# Altium PCB PCB1.PcbDoc (part 9 of 10)
Units mm, origin at the board's own origin, x right, y up, seen from the top; angles counter-clockwise.
Board outline 171.83 x 244.04 mm, 2 copper layers (Top Layer, Bottom Layer); 100 components, 186 nets, 878 pads, 221 vias.
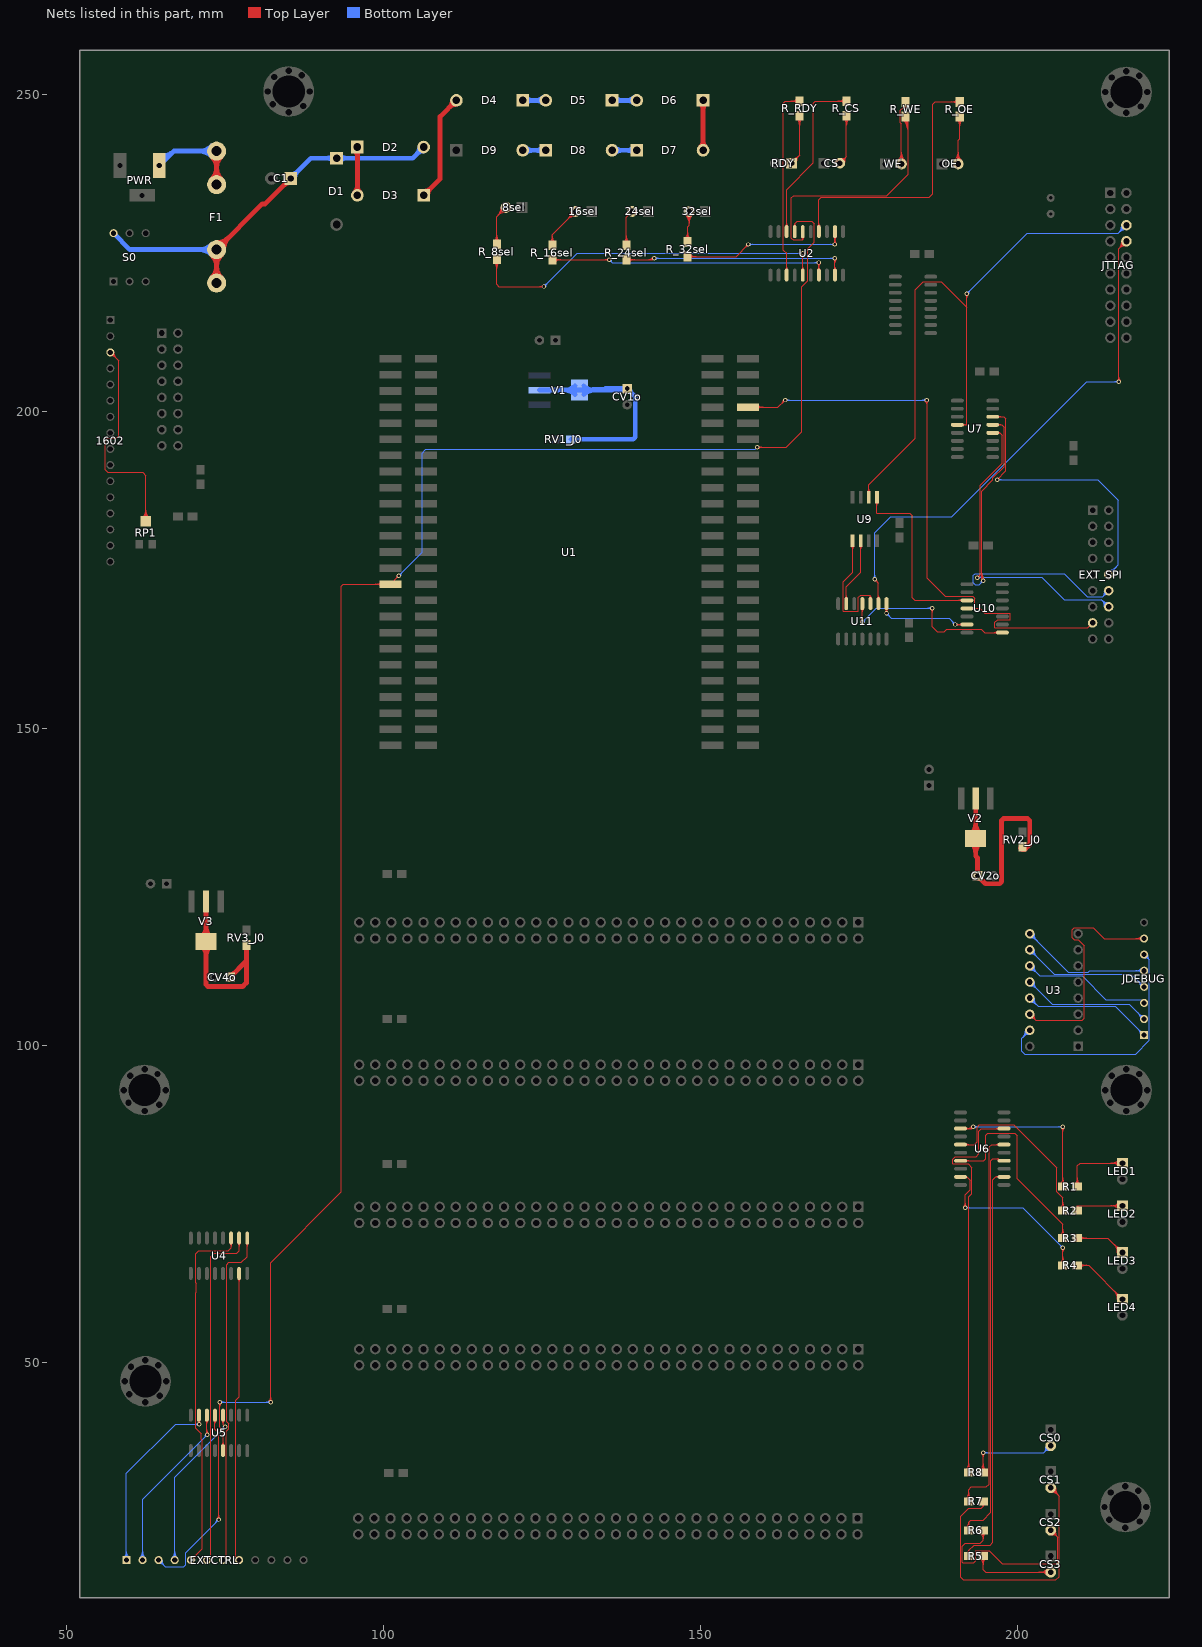
[diagram p9: the nets of this part, all layers, seen from the top]

## Via types
v1: diameter 0.7, hole 0.4, Top Layer to Bottom Layer, 221 vias

## Nets (pads, with @x,y where several pads share a name; then routed paths per layer and width w, separated by ;. In a path a pad name is that pad's centre, name@x,y a point inside that pad or via, vN(x,y) a via of type N, cw(c..) or ccw(c..) an arc to the next point about the centre after c; other vN are vias at no path point) (continued)
MISO5: EXT_SPI.10 U7.14 | length 54
  Top Layer w0.152: U7.14@196.088,199.136 197.802,199.136 198.145,198.793 198.145,190.602 v1(196.774,189.23) ; v1@196.774,189.504 ccw(c196.774,190.165) 197.241,189.697 ccw(c197.709,189.23) v1@197.048,189.23 ; U7.14@196.961,198.974 cw(c197.351,198.584) 197.351,199.136 cw(c197.351,199.688) U7.14@196.961,199.298
  Bottom Layer w0.152: v1(196.774,189.23) 212.636,189.23 215.9,185.966 215.9,175.768 EXT_SPI.10@214.376,174.244 ; v1@196.967,189.036 cw(c197.435,188.569) 197.435,189.23 cw(c197.435,189.891) v1@196.967,189.424 ; EXT_SPI.10@214.376,174.613 ccw(c214.376,175.504) 215.006,174.874 ccw(c215.636,174.244) EXT_SPI.10@214.745,174.244 ; EXT_SPI.10@214.376,174.765 ccw(c214.376,176.024) 215.266,175.134 ccw(c216.156,174.244) EXT_SPI.10@214.897,174.244 ; EXT_SPI.10@214.376,174.918 ccw(c214.376,176.544) 215.526,175.394 ccw(c216.676,174.244) EXT_SPI.10@215.05,174.244
MISO6: EXT_SPI.12 U7.13 | length 62
  Top Layer w0.152: 194.361,173.756 ccw(c195.066,173.756) v1@194.567,173.257 ; 194.361,174.124 ccw(c195.434,174.124) v1@194.675,173.365 ; 194.361,174.492 ccw(c195.802,174.492) v1@194.783,173.472 ; v1(194.589,173.279) 194.361,173.507 194.361,187.427 196.124,189.19 196.124,189.547 197.866,191.289 197.866,197.485 197.485,197.866 U7.13@196.088,197.866 ; U7.13@196.961,197.704 cw(c197.351,197.314) 197.351,197.866 cw(c197.351,198.418) U7.13@196.961,198.028
  Bottom Layer w0.152: v1@194.316,173.279 cw(c193.655,173.279) 194.122,172.811 cw(c194.589,172.344) v1@194.589,173.005 ; v1(194.589,173.279) 193.954,172.644 193.357,172.644 193.04,172.961 193.04,174.117 193.3,174.377 207.392,174.377 211.03,170.739 213.411,170.739 ; EXT_SPI.12@213.708,171.616 cw(c212.671,171.478) 213.411,170.739 ; EXT_SPI.12@213.859,171.636 cw(c213.057,171.529) 213.629,170.957 cw(c214.201,170.385) EXT_SPI.12@214.308,171.187 ; EXT_SPI.12@214.288,171.036 ccw(c214.15,169.999) 213.411,170.739 ; EXT_SPI.12@214.376,171.704 213.411,170.739
MISO7: EXT_SPI.14 U7.12 | length 57.4
  Top Layer w0.152: v1(193.637,173.736) 194.081,174.18 ; v1@193.647,174.01 ccw(c193.668,174.594) 194.081,174.18 ; v1@193.911,173.746 cw(c194.495,173.767) 194.081,174.18 ; U7.12@196.088,196.596 197.206,196.596 ; U7.12@196.995,196.477 cw(c197.206,196.349) 197.206,196.596 ; U7.12@196.995,196.715 ccw(c197.206,196.843) 197.206,196.596 ; 194.081,174.18 194.081,188.322 197.587,191.827 197.587,196.215 197.206,196.596
  Bottom Layer w0.152: v1(193.637,173.736) 193.755,173.854 203.786,173.854 207.334,170.307 213.233,170.307 ; v1@193.723,173.65 cw(c194.216,173.157) 194.216,173.854 ; v1@193.831,173.542 cw(c194.584,172.789) 194.584,173.854 ; v1@193.831,173.93 ccw(c194.012,174.111) 194.012,173.854 ; EXT_SPI.14@213.702,169.167 ccw(c212.1,169.174) 213.233,170.307 ; EXT_SPI.14@213.855,169.166 ccw(c212.615,169.172) 213.492,170.048 ccw(c214.368,170.925) EXT_SPI.14@214.374,169.685 ; EXT_SPI.14@214.007,169.166 ccw(c213.13,169.17) 213.75,169.79 ccw(c214.37,170.41) EXT_SPI.14@214.374,169.533 ; EXT_SPI.14@214.373,169.838 cw(c214.366,171.44) 213.233,170.307 ; EXT_SPI.14@214.376,169.164 213.233,170.307
MISO_JTTAG: JTTAG.6 U7.4 U9.2 | length 108.5
  Top Layer w0.152: U9.2@176.367,187.309 ccw(c175.976,187.699) 176.528,187.699 ccw(c177.08,187.699) U9.2@176.69,187.309 ; U9.2@176.528,186.436 176.528,188.443 183.845,195.759 183.845,219.202 185.115,220.472 187.96,220.472 191.999,216.433 ; U7.4@190.5,197.866 191.973,197.866 191.999,197.891 191.999,216.433 ; U7.4@191.373,197.704 cw(c191.763,197.314) 191.763,197.866 cw(c191.763,198.418) U7.4@191.373,198.028 ; v1@191.805,218.373 cw(c191.338,217.906) 191.999,217.906 cw(c192.66,217.906) v1@192.192,218.373 ; v1(191.999,218.567) 191.999,216.433
  Bottom Layer w0.152: v1(191.999,218.567) 201.524,228.092 215.9,228.092 ; v1@191.999,218.841 ccw(c191.999,219.502) 192.466,219.034 ccw(c192.933,218.567) v1@192.272,218.567 ; JTTAG.6@216.421,229.359 cw(c214.642,229.35) 215.9,228.092 ; JTTAG.6@216.574,229.359 cw(c215.156,229.353) 216.159,228.351 cw(c217.161,227.348) JTTAG.6@217.167,228.766 ; JTTAG.6@216.726,229.36 cw(c215.671,229.355) 216.417,228.609 cw(c217.163,227.863) JTTAG.6@217.168,228.918 ; JTTAG.6@217.167,228.613 ccw(c217.158,226.834) 215.9,228.092 ; JTTAG.6@217.17,229.362 215.9,228.092
MOSI: EXT_SPI.15 U1.8 U10.4 | length 103.2
  Top Layer w0.152: U1.8@157.48,200.66 162.204,200.66 v1(163.322,201.778) ; U1.8@158.893,200.397 cw(c159.527,199.763) 159.527,200.66 cw(c159.527,201.557) U1.8@158.893,200.923 ; U1.8@159,200.29 cw(c159.895,199.395) 159.895,200.66 cw(c159.895,201.925) U1.8@159,201.03 ; v1@163.048,201.778 cw(c162.387,201.778) 162.855,201.31 cw(c163.322,200.843) v1@163.322,201.504 ; v1@185.455,201.584 cw(c184.79,200.919) 185.73,200.919 ; v1@185.563,201.692 cw(c185.158,201.287) 185.73,201.287 ; v1(185.649,201.778) 185.73,201.696 185.73,173.705 188.62,170.815 192.926,170.815 193.243,170.498 193.243,168.935 193.218,168.91 ; 185.73,201.314 cw(c186.112,201.314) v1@185.842,201.584 ; U10.4@192.024,168.91 193.218,168.91 ; U10.4@192.912,168.765 cw(c193.218,168.515) 193.218,168.91 ; U10.4@192.912,169.055 ccw(c193.218,169.305) 193.218,168.91 ; EXT_SPI.15@211.836,166.624 211.049,165.837 196.418,165.837 196.393,165.862 196.393,166.688 196.837,167.132 198.806,167.132 198.831,167.157 198.831,168.123 198.806,168.148 194.818,168.148 194.056,168.91 193.218,168.91
  Bottom Layer w0.152: v1(163.322,201.778) v1(185.649,201.778) ; v1@163.516,201.584 cw(c163.983,201.117) 163.983,201.778 cw(c163.983,202.439) v1@163.516,201.971 ; v1@185.455,201.584 ccw(c184.988,201.117) 184.988,201.778 ccw(c184.988,202.439) v1@185.455,201.971
MOSI_JTTAG: JTTAG.8 U11.2 | length 93.6
  Top Layer w0.152: v1@177.449,173.203 cw(c177.449,172.542) 177.917,173.01 cw(c178.384,173.477) v1@177.723,173.477 ; v1(177.449,173.477) 178.054,172.872 U11.2@178.054,169.672 ; U11.2@177.892,170.545 ccw(c177.502,170.935) 178.054,170.935 ccw(c178.606,170.935) U11.2@178.216,170.545 ; v1@215.783,204.867 ccw(c215.315,205.334) 215.976,205.334 ccw(c216.637,205.334) v1@216.17,204.867 ; v1(215.976,204.673) 215.976,225.628 ; JTTAG.8@216.422,226.785 cw(c214.895,226.709) 215.976,225.628 ; JTTAG.8@216.574,226.792 cw(c215.358,226.732) 216.219,225.871 cw(c217.08,225.01) JTTAG.8@217.14,226.226 ; JTTAG.8@216.727,226.8 cw(c215.821,226.755) 216.462,226.114 cw(c217.103,225.473) JTTAG.8@217.148,226.379 ; JTTAG.8@217.133,226.074 ccw(c217.057,224.547) 215.976,225.628 ; JTTAG.8@217.17,226.822 215.976,225.628
  Bottom Layer w0.152: v1@177.256,173.671 ccw(c176.788,174.138) 177.449,174.138 ccw(c178.11,174.138) v1@177.643,173.671 ; v1(177.449,173.477) 177.449,180.816 180.021,183.388 189.611,183.388 210.896,204.673 v1(215.976,204.673) ; v1@215.783,204.48 ccw(c215.315,204.012) 215.315,204.673 ccw(c215.315,205.334) v1@215.783,204.867
Net8sel_2: 8sel.2 R_8sel.2 | length 17.2
  Top Layer w0.152: R_8sel.2@117.461,226.836 ccw(c116.507,227.79) 117.856,227.79 ccw(c119.205,227.79) R_8sel.2@118.251,226.836 ; R_8sel.2@117.569,226.728 ccw(c116.875,227.422) 117.856,227.422 ccw(c118.837,227.422) R_8sel.2@118.143,226.728 ; R_8sel.2@117.856,226.314 117.856,230.707 8sel.2@119.305,232.156 ; 8sel.2@118.532,232.156 cw(c116.664,232.156) 117.985,230.835 cw(c119.305,229.514) 8sel.2@119.305,231.382 ; 8sel.2@118.684,232.156 cw(c117.184,232.156) 118.245,231.095 cw(c119.305,230.034) 8sel.2@119.305,231.535 ; 8sel.2@118.836,232.156 cw(c117.704,232.156) 118.505,231.355 cw(c119.305,230.555) 8sel.2@119.305,231.687
Net16sel_2: 16sel.2 R_16sel.2 | length 17.6
  Top Layer w0.152: R_16sel.2@126.224,226.709 ccw(c125.27,227.663) 126.619,227.663 ccw(c127.968,227.663) R_16sel.2@127.014,226.709 ; R_16sel.2@126.332,226.601 ccw(c125.638,227.295) 126.619,227.295 ccw(c127.6,227.295) R_16sel.2@126.906,226.601 ; R_16sel.2@126.619,226.187 126.619,227.853 16sel.2@130.287,231.521 ; 16sel.2@129.513,231.521 cw(c127.645,231.521) 128.966,230.2 cw(c130.287,228.879) 16sel.2@130.287,230.747 ; 16sel.2@129.666,231.521 cw(c128.166,231.521) 129.226,230.46 cw(c130.287,229.399) 16sel.2@130.287,230.9 ; 16sel.2@129.818,231.521 cw(c128.686,231.521) 129.487,230.72 cw(c130.287,229.92) 16sel.2@130.287,231.052
Net24sel_2: 24sel.2 R_24sel.2 | length 9.4
  Top Layer w0.152: R_24sel.2@137.908,226.709 ccw(c136.954,227.663) 138.303,227.663 ccw(c139.652,227.663) R_24sel.2@138.698,226.709 ; R_24sel.2@138.016,226.601 ccw(c137.322,227.295) 138.303,227.295 ccw(c139.284,227.295) R_24sel.2@138.59,226.601 ; R_24sel.2@138.303,226.187 138.303,230.587 24sel.2@139.237,231.521
Net32sel_2: 32sel.2 R_32sel.2 | length 15.7
  Top Layer w0.152: R_32sel.2@147.56,227.217 ccw(c146.606,228.171) 147.955,228.171 ccw(c149.304,228.171) R_32sel.2@148.35,227.217 ; 32sel.2@147.64,230.974 cw(c146.319,229.653) 148.187,229.653 cw(c150.055,229.653) 32sel.2@148.734,230.974 ; R_32sel.2@147.668,227.109 ccw(c146.974,227.803) 147.955,227.803 ccw(c148.936,227.803) R_32sel.2@148.242,227.109 ; 32sel.2@147.748,231.082 cw(c146.687,230.021) 148.187,230.021 cw(c149.687,230.021) 32sel.2@148.626,231.082 ; 32sel.2@147.855,231.189 cw(c147.055,230.389) 148.187,230.389 cw(c149.319,230.389) 32sel.2@148.519,231.189 ; R_32sel.2@147.955,226.695 147.955,229.108 148.187,229.34 32sel.2@148.187,231.521
Net1602_3: 1602.3 RP1.2 | length 44.8
  Top Layer w0.152: 1602.3@56.896,208.737 cw(c56.896,207.388) 57.85,208.342 cw(c58.804,209.296) 1602.3@57.455,209.296 ; 1602.3@56.896,208.89 cw(c56.896,207.908) 57.59,208.602 cw(c58.284,209.296) 1602.3@57.302,209.296 ; 1602.3@56.896,209.296 58.191,208.001 58.191,196.164 57.785,195.758 56.515,195.758 56.058,195.301 56.058,190.817 56.502,190.373 61.976,190.373 62.484,189.865 RP1.2@62.484,182.648 ; RP1.2@61.972,183.16 ccw(c60.737,184.395) 62.484,184.395 ccw(c64.231,184.395) RP1.2@62.996,183.16 ; RP1.2@62.08,183.052 ccw(c61.105,184.027) 62.484,184.027 ccw(c63.863,184.027) RP1.2@62.888,183.052 ; RP1.2@62.188,182.944 ccw(c61.472,183.66) 62.484,183.66 ccw(c63.496,183.66) RP1.2@62.78,182.944
NetC1_1: C1.1 D1.2 D2.1 F1.1 S0.6 | length 90.7
  Top Layer w0.762: F1.1@72.869,221.023 ccw(c70.958,222.934) 73.66,222.934 ccw(c76.362,222.934) F1.1@74.451,221.023 ; F1.1@72.869,224.711 cw(c70.958,222.801) 73.66,222.801 cw(c76.362,222.801) F1.1@74.451,224.711 ; F1.1@73.66,220.232 F1.1@73.66,225.502 80.873,232.715 81.331,232.715 C1.1@85.344,236.728 ; F1.1@73.66,226.621 ccw(c73.66,229.323) 75.57,227.412 ccw(c77.481,225.502) F1.1@74.779,225.502 ; C1.1@84.725,236.728 cw(c83.231,236.728) 84.287,235.671 cw(c85.344,234.615) C1.1@85.344,236.109
  Bottom Layer w0.762: S0.6@57.404,228.092 59.994,225.502 F1.1@73.66,225.502 ; F1.1@72.869,224.711 ccw(c70.958,222.801) 70.958,225.502 ccw(c70.958,228.204) F1.1@72.869,226.293 ; C1.1@85.344,236.728 88.542,239.926 D1.2@92.583,239.926 104.567,239.926 D2.1@106.322,241.681 ; C1.1@85.344,237.347 ccw(c85.344,238.841) 86.401,237.785 ccw(c87.457,236.728) C1.1@85.963,236.728 ; D1.2@92.145,239.488 ccw(c91.089,238.432) 91.089,239.926 ccw(c91.089,241.42) D1.2@92.145,240.364 ; D1.2@93.021,239.488 cw(c94.077,238.432) 94.077,239.926 cw(c94.077,241.42) D1.2@93.021,240.364 ; D2.1@105.703,241.681 cw(c104.209,241.681) 105.265,240.624 cw(c106.322,239.568) D2.1@106.322,241.062
NetCS0_2: CS0.2 R8.2 | length 24.9
  Top Layer w0.152: R8.2@194.169,33.034 ccw(c193.215,33.988) 194.564,33.988 ccw(c195.913,33.988) R8.2@194.959,33.034 ; R8.2@194.277,32.926 ccw(c193.583,33.62) 194.564,33.62 ccw(c195.545,33.62) R8.2@194.851,32.926 ; v1@194.37,35.57 cw(c193.903,35.102) 194.564,35.102 cw(c195.225,35.102) v1@194.758,35.57 ; R8.2@194.564,32.639 v1(194.564,35.763)
  Bottom Layer w0.152: v1(194.564,35.763) 204.165,35.763 ; v1@194.758,35.57 cw(c195.225,35.102) 195.225,35.763 cw(c195.225,36.424) v1@194.758,35.957 ; CS0.2@204.468,36.705 cw(c203.399,36.53) 204.165,35.763 ; CS0.2@204.619,36.729 cw(c203.76,36.589) 204.375,35.973 cw(c204.991,35.358) CS0.2@205.131,36.217 ; CS0.2@204.769,36.754 cw(c204.121,36.648) 204.585,36.183 cw(c205.05,35.719) CS0.2@205.156,36.367 ; CS0.2@205.107,36.066 ccw(c204.932,34.997) 204.165,35.763 ; CS0.2@205.232,36.83 204.165,35.763
NetCS1_2: CS1.2 R7.2 | length 52.8
  Top Layer w0.152: R7.2@194.396,27.534 cw(c194.324,27.305) 194.564,27.305 ; R7.2@194.564,28.067 194.564,27.305 ; R7.2@194.732,27.534 ccw(c194.804,27.305) 194.564,27.305 ; CS1.2@205.232,29.452 cw(c205.232,27.584) 206.553,28.905 cw(c207.874,30.226) CS1.2@206.006,30.226 ; CS1.2@205.232,29.605 cw(c205.232,28.104) 206.293,29.165 cw(c207.354,30.226) CS1.2@205.853,30.226 ; CS1.2@205.232,29.757 cw(c205.232,28.625) 206.033,29.425 cw(c206.833,30.226) CS1.2@205.701,30.226 ; CS1.2@205.232,30.226 206.578,28.88 206.578,16.192 206.058,15.672 191.452,15.672 191.033,16.091 191.033,25.717 192.303,26.987 194.246,26.987 194.564,27.305
NetCS2_2: CS2.2 R6.2 | length 39.6
  Top Layer w0.152: R6.2@194.169,23.1 cw(c193.215,22.146) 194.564,22.146 cw(c195.913,22.146) R6.2@194.959,23.1 ; R6.2@194.277,23.208 cw(c193.583,22.514) 194.564,22.514 cw(c195.545,22.514) R6.2@194.851,23.208 ; R6.2@194.564,23.495 194.564,21.907 194.119,21.463 191.77,21.463 191.313,21.006 191.313,18.44 191.338,18.415 193.103,18.415 193.421,18.732 193.421,20.244 193.446,20.269 195.529,20.269 197.561,18.237 206.273,18.237 206.299,18.263 206.299,22.428 ; CS2.2@205.232,23.495 206.299,22.428 ; CS2.2@205.308,23.032 cw(c205.414,22.384) 205.879,22.848 cw(c206.343,23.313) CS2.2@205.695,23.419 ; CS2.2@205.333,22.882 cw(c205.473,22.023) 206.089,22.638 cw(c206.704,23.254) CS2.2@205.845,23.394 ; CS2.2@205.357,22.731 cw(c205.532,21.662) 206.299,22.428 ; CS2.2@205.996,23.37 ccw(c207.065,23.195) 206.299,22.428
NetCS3_2: CS3.2 R5.2 | length 23.7
  Top Layer w0.152: R5.2@194.169,19.036 cw(c193.215,18.082) 194.564,18.082 cw(c195.913,18.082) R5.2@194.959,19.036 ; R5.2@194.277,19.144 cw(c193.583,18.45) 194.564,18.45 cw(c195.545,18.45) R5.2@194.851,19.144 ; R5.2@194.564,19.431 194.564,17.272 194.945,16.891 CS3.2@205.232,16.891 ; CS3.2@204.685,16.344 ccw(c203.364,15.023) 203.364,16.891 ccw(c203.364,18.759) CS3.2@204.685,17.438 ; CS3.2@204.793,16.452 ccw(c203.732,15.391) 203.732,16.891 ccw(c203.732,18.391) CS3.2@204.793,17.33 ; CS3.2@204.9,16.559 ccw(c204.1,15.759) 204.1,16.891 ccw(c204.1,18.023) CS3.2@204.9,17.223
NetCS_2: CS.2 R_CS.2 | length 16.3
  Top Layer w0.152: CS.2@171.965,239.141 173.006,240.181 ; CS.2@172.051,239.602 ccw(c172.162,240.205) 172.596,239.772 ccw(c173.03,239.338) CS.2@172.427,239.226 ; CS.2@172.078,239.752 ccw(c172.226,240.551) 172.801,239.976 ccw(c173.375,239.402) CS.2@172.576,239.254 ; CS.2@172.106,239.902 ccw(c172.29,240.897) 173.006,240.181 ; R_CS.2@172.611,246.112 cw(c171.657,245.158) 173.006,245.158 cw(c174.355,245.158) R_CS.2@173.401,246.112 ; R_CS.2@172.718,246.22 cw(c172.025,245.526) 173.006,245.526 cw(c173.987,245.526) R_CS.2@173.293,246.22 ; CS.2@172.726,239.282 cw(c173.721,239.466) 173.006,240.181 ; R_CS.2@173.006,246.634 173.006,240.181
NetCV1o_1: CV1o.1 RV1_J0.1 V1.2 V1.4 | length 52.8
  Bottom Layer w0.762: V1.2@124.587,203.341 V1.4@130.887,203.341 ; RV1_J0.1@129.54,195.58 139.382,195.58 139.7,195.897 139.7,202.311 138.67,203.341 138.424,203.341 V1.4@130.887,203.341 ; V1.4@130.202,202.656 ccw(c128.548,201.002) 128.548,203.341 ccw(c128.548,205.68) V1.4@130.202,204.026 ; V1.4@131.572,202.656 cw(c133.226,201.002) 133.226,203.341 cw(c133.226,205.68) V1.4@131.572,204.026 ; V1.4@131.669,203.069 cw(c132.365,202.56) 132.317,203.421 cw(c132.292,203.876) V1.4@131.843,203.801 ; 136.951,203.341 ccw(c136.951,205.043) 138.155,203.84 cw(c137.504,204.49) 137.504,203.57 cw(c137.504,202.65) CV1o.1@138.155,203.301 ; CV1o.1@138.424,203.189 cw(c138.424,202.229) CV1o.1@139.103,202.908 ; CV1o.1@138.424,203.57 134.977,203.57 V1.4@130.887,203.341 ; CV1o.1@138.805,203.57 ccw(c139.685,203.57) CV1o.1@139.063,202.948
NetCV2o_1: CV2o.1 RV2_J0.1 V2.2 V2.4 | length 48.6
  Top Layer w0.762: V2.4@192.711,131.947 cw(c191.057,130.293) 193.396,130.293 cw(c195.736,130.293) V2.4@194.081,131.947 ; V2.4@192.711,133.317 ccw(c191.057,134.972) 193.396,134.972 ccw(c195.736,134.972) V2.4@194.081,133.317 ; V2.2@193.396,138.932 V2.4@193.396,132.632 193.396,129.819 193.675,129.54 CV2o.1@193.675,126.746 194.945,125.476 197.167,125.476 197.485,125.793 197.485,135.445 197.802,135.763 201.612,135.763 201.93,135.445 201.93,131.63 ; CV2o.1@193.406,127.015 ccw(c192.755,127.666) 193.675,127.666 ccw(c194.595,127.666) CV2o.1@193.944,127.015 ; CV2o.1@193.675,126.365 cw(c193.675,125.445) 194.325,126.096 cw(c194.976,126.746) CV2o.1@194.056,126.746 ; RV2_J0.1@200.423,131.074 ccw(c200.899,131.566) RV2_J0.1@201.382,131.082 ; RV2_J0.1@200.776,131.312 201.612,131.312 201.93,131.63 ; RV2_J0.1@200.953,131.622 ccw(c201.437,132.122) 201.93,131.63
NetCV4o_1: CV4o.1 RV3_J0.1 V3.2 V3.4 | length 38.2
  Top Layer w0.762: V3.4@71.31,115.697 cw(c69.656,114.043) 71.995,114.043 cw(c74.334,114.043) V3.4@72.68,115.697 ; V3.4@71.31,117.067 ccw(c69.656,118.721) 71.995,118.721 ccw(c74.334,118.721) V3.4@72.68,117.067 ; V3.2@71.995,122.682 V3.4@71.995,116.382 71.995,109.537 72.262,109.271 77.787,109.271 78.359,109.842 78.359,113.289 ; CV4o.1@75.808,110.738 78.359,113.289 ; CV4o.1@75.808,111.119 ccw(c75.808,112.039) 76.459,111.389 ccw(c77.109,110.738) CV4o.1@76.189,110.738 ; RV3_J0.1@78.359,115.824 78.359,113.289
NetD2_2: D2.2 D3.1 | length 12.3
  Top Layer w0.762: D3.1@95.424,234.499 ccw(c94.368,235.555) 95.862,235.555 ccw(c97.356,235.555) D3.1@96.3,234.499 ; D2.2@95.424,241.243 cw(c94.368,240.187) 95.862,240.187 cw(c97.356,240.187) D2.2@96.3,241.243 ; D3.1@95.862,234.061 D2.2@95.862,241.681
NetD3_2: D3.2 D4.1 | length 21.8
  Top Layer w0.762: D3.2@106.322,234.061 108.915,236.654 108.915,246.479 D4.1@111.483,249.047 ; D3.2@106.322,234.68 ccw(c106.322,236.174) 107.379,235.118 ccw(c108.435,234.061) D3.2@106.941,234.061 ; D4.1@110.864,249.047 cw(c109.37,249.047) 110.426,247.99 cw(c111.483,246.934) D4.1@111.483,248.428
NetD4_2: D4.2 D5.1 | length 8.3
  Bottom Layer w0.762: D4.2@121.943,249.047 D5.1@125.58,249.047 ; D4.2@122.381,248.609 cw(c123.437,247.553) 123.437,249.047 cw(c123.437,250.541) D4.2@122.381,249.485 ; D5.1@125.142,248.609 ccw(c124.086,247.553) 124.086,249.047 ccw(c124.086,250.541) D5.1@125.142,249.485
NetD5_2: D5.2 D6.1 | length 8.6
  Bottom Layer w0.762: D5.2@136.04,249.047 D6.1@139.931,249.047 ; D5.2@136.478,248.609 cw(c137.534,247.553) 137.534,249.047 cw(c137.534,250.541) D5.2@136.478,249.485 ; D6.1@139.493,248.609 ccw(c138.437,247.553) 138.437,249.047 ccw(c138.437,250.541) D6.1@139.493,249.485
NetD6_2: D6.2 D7.1 | length 12.6
  Top Layer w0.762: D7.1@149.953,241.611 ccw(c148.897,242.667) 150.391,242.667 ccw(c151.885,242.667) D7.1@150.829,241.611 ; D6.2@149.953,248.609 cw(c148.897,247.553) 150.391,247.553 cw(c151.885,247.553) D6.2@150.829,248.609 ; D7.1@150.391,241.173 D6.2@150.391,249.047
NetD7_2: D7.2 D8.1 | length 8.6
  Bottom Layer w0.762: D8.1@136.04,241.173 D7.2@139.931,241.173 ; D8.1@136.478,240.735 cw(c137.534,239.679) 137.534,241.173 cw(c137.534,242.667) D8.1@136.478,241.611 ; D7.2@139.493,240.735 ccw(c138.437,239.679) 138.437,241.173 ccw(c138.437,242.667) D7.2@139.493,241.611
NetD8_2: D8.2 D9.1 | length 8.3
  Bottom Layer w0.762: D9.1@121.943,241.173 D8.2@125.58,241.173 ; D9.1@122.381,240.735 cw(c123.437,239.679) 123.437,241.173 cw(c123.437,242.667) D9.1@122.381,241.611 ; D8.2@125.142,240.735 ccw(c124.086,239.679) 124.086,241.173 ccw(c124.086,242.667) D8.2@125.142,241.611
NetEXTCTRL_1: EXTCTRL.1 U5.15 | length 36.8
  Top Layer w0.152: U5.15@70.704,40.783 cw(c70.314,40.393) 70.866,40.393 cw(c71.418,40.393) U5.15@71.028,40.783 ; v1@70.723,40.402 ccw(c70.378,40.747) U5.15@70.866,40.747 ; 70.866,40.624 ccw(c71.333,40.624) v1@71.003,40.294 ; U5.15@70.866,40.992 ccw(c71.7,40.992) v1@71.11,40.402 ; U5.15@70.866,41.656 70.866,40.259 v1(70.917,40.208)
  Bottom Layer w0.152: EXTCTRL.1@59.041,19.191 ccw(c58.087,20.145) 59.436,20.145 ccw(c60.785,20.145) EXTCTRL.1@59.831,19.191 ; EXTCTRL.1@59.149,19.083 ccw(c58.455,19.777) 59.436,19.777 ccw(c60.417,19.777) EXTCTRL.1@59.723,19.083 ; EXTCTRL.1@59.436,18.796 59.436,32.461 67.183,40.208 v1(70.917,40.208) ; v1@70.723,40.015 ccw(c70.256,39.547) 70.256,40.208 ccw(c70.256,40.869) v1@70.723,40.402
NetEXTCTRL_2: EXTCTRL.2 U5.14 | length 34.1
  Top Layer w0.152: U5.14@71.974,40.783 cw(c71.584,40.393) 72.136,40.393 cw(c72.688,40.393) U5.14@72.298,40.783 ; v1@71.993,38.776 ccw(c71.648,39.121) 72.136,39.121 ; 72.136,38.998 ccw(c72.603,38.998) v1@72.273,38.668 ; 72.136,39.366 ccw(c72.97,39.366) v1@72.38,38.776 ; U5.14@72.136,41.656 72.136,38.633 v1(72.187,38.583)
  Bottom Layer w0.152: EXTCTRL.2@61.581,19.191 ccw(c60.627,20.145) 61.976,20.145 ccw(c63.325,20.145) EXTCTRL.2@62.371,19.191 ; EXTCTRL.2@61.689,19.083 ccw(c60.995,19.777) 61.976,19.777 ccw(c62.957,19.777) EXTCTRL.2@62.263,19.083 ; EXTCTRL.2@61.976,18.796 61.976,28.372 v1(72.187,38.583) ; v1@71.913,38.583 cw(c71.252,38.583) 71.719,38.115 cw(c72.187,37.648) v1@72.187,38.309
NetEXTCTRL_3: EXTCTRL.3 U5.13 | length 37.4
  Top Layer w0.152: U5.13@73.244,40.783 cw(c72.854,40.393) 73.406,40.393 cw(c73.958,40.393) U5.13@73.568,40.783 ; U5.13@73.406,41.656 73.406,39.446 73.99,38.862 v1(73.99,25.197) ; v1@73.797,25.39 ccw(c73.329,25.858) 73.99,25.858 ccw(c74.651,25.858) v1@74.184,25.39
  Bottom Layer w0.152: EXTCTRL.3@64.516,18.237 cw(c64.516,16.888) 65.47,17.842 cw(c66.424,18.796) EXTCTRL.3@65.075,18.796 ; EXTCTRL.3@64.516,18.39 cw(c64.516,17.408) 65.21,18.102 cw(c65.904,18.796) EXTCTRL.3@64.922,18.796 ; EXTCTRL.3@64.516,18.796 65.532,17.78 68.44,17.78 68.758,18.098 68.758,19.964 v1(73.99,25.197) ; v1@73.716,25.197 cw(c73.055,25.197) 73.523,24.729 cw(c73.99,24.262) v1@73.99,24.923
NetEXTCTRL_4: EXTCTRL.4 U5.12 | length 31.9
  Top Layer w0.152: U5.12@74.514,40.783 cw(c74.124,40.393) 74.676,40.393 cw(c75.228,40.393) U5.12@74.838,40.783 ; U5.12@74.676,41.656 74.676,40.183 v1(75.006,39.853)
  Bottom Layer w0.152: EXTCTRL.4@66.661,19.191 ccw(c65.707,20.145) 67.056,20.145 ccw(c68.405,20.145) EXTCTRL.4@67.451,19.191 ; EXTCTRL.4@66.769,19.083 ccw(c66.075,19.777) 67.056,19.777 ccw(c68.037,19.777) EXTCTRL.4@67.343,19.083 ; EXTCTRL.4@67.056,18.796 67.056,31.902 v1(75.006,39.853) ; v1@74.732,39.853 cw(c74.071,39.853) 74.539,39.385 cw(c75.006,38.918) v1@75.006,39.579
NetEXTCTRL_5: EXTCTRL.5 U4.11 | length 61.6
  Top Layer w0.152: EXTCTRL.5@69.596,18.796 71.374,20.574 71.374,37.723 71.247,37.85 71.247,38.739 70.358,39.628 70.358,60.962 70.466,61.07 70.466,62.463 70.358,62.57 70.358,67.107 70.852,67.601 75.475,67.601 75.946,68.072 U4.11@75.946,69.596 ; EXTCTRL.5@69.596,19.202 ccw(c69.596,20.184) 70.29,19.49 ccw(c70.984,18.796) EXTCTRL.5@70.002,18.796 ; EXTCTRL.5@69.596,19.355 ccw(c69.596,20.704) 70.55,19.75 ccw(c71.504,18.796) EXTCTRL.5@70.155,18.796 ; U4.11@75.784,68.723 cw(c75.394,68.333) 75.946,68.333 cw(c76.498,68.333) U4.11@76.108,68.723
NetEXTCTRL_6: EXTCTRL.6 U4.10 | length 55.9
  Top Layer w0.152: EXTCTRL.6@72.136,18.796 72.74,19.4 72.74,66.675 73.273,67.208 76.835,67.208 77.216,67.589 U4.10@77.216,69.596 ; U4.10@77.054,68.723 cw(c76.664,68.333) 77.216,68.333 cw(c77.768,68.333) U4.10@77.378,68.723
NetEXTCTRL_7: EXTCTRL.7 U4.9 | length 54.6
  Top Layer w0.152: EXTCTRL.7@74.676,18.796 75.184,19.304 75.184,39.158 75.565,39.539 75.565,40.329 75.274,40.62 75.274,65.405 75.608,65.738 77.549,65.738 78.486,66.675 U4.9@78.486,69.596 ; U4.9@78.324,68.723 cw(c77.934,68.333) 78.486,68.333 cw(c79.038,68.333) U4.9@78.648,68.723
NetEXTCTRL_8: EXTCTRL.8 U4.7 | length 46.5
  Top Layer w0.152: U4.7@77.054,63.135 cw(c76.664,62.745) 77.216,62.745 cw(c77.768,62.745) U4.7@77.378,63.135 ; EXTCTRL.8@77.216,18.796 76.708,19.304 76.708,44.038 77.216,44.546 U4.7@77.216,64.008
NetF1_2: F1.2 PWR.1 | length 31.7
  Top Layer w0.762: F1.2@72.869,236.553 ccw(c70.958,238.463) 73.66,238.463 ccw(c76.362,238.463) F1.2@74.451,236.553 ; F1.2@72.869,240.241 cw(c70.958,238.33) 73.66,238.33 cw(c76.362,238.33) F1.2@74.451,240.241 ; F1.2@73.66,235.762 F1.2@73.66,241.032
  Bottom Layer w0.762: PWR.1@64.593,239.62 ccw(c64.861,241.026) 65.874,240.014 ; PWR.1@64.62,238.76 66.892,241.032 ; PWR.1@64.736,240.368 ccw(c65.187,242.737) 66.892,241.032 ; F1.2@72.869,240.241 ccw(c70.958,238.33) 70.958,241.032 ccw(c70.958,243.733) F1.2@72.869,241.823 ; F1.2@73.66,241.032 66.892,241.032
NetJDEBUG_1: JDEBUG.1 U3.13 | length 30
  Bottom Layer w0.152: U3.13@201.93,106.768 cw(c201.93,105.142) 203.08,106.292 cw(c204.23,107.442) U3.13@202.604,107.442 ; U3.13@201.93,106.921 cw(c201.93,105.662) 202.82,106.552 cw(c203.71,107.442) U3.13@202.451,107.442 ; U3.13@201.93,107.073 cw(c201.93,106.182) 202.56,106.812 cw(c203.19,107.442) U3.13@202.299,107.442 ; U3.13@201.93,107.442 203.237,106.135 215.429,106.135 JDEBUG.1@219.964,101.6 ; JDEBUG.1@219.405,101.6 ccw(c218.056,101.6) 219.01,102.554 ccw(c219.964,103.508) JDEBUG.1@219.964,102.159 ; JDEBUG.1@219.558,101.6 ccw(c218.576,101.6) 219.27,102.294 ccw(c219.964,102.988) JDEBUG.1@219.964,102.006
NetJDEBUG_2: JDEBUG.2 U3.12 | length 30
  Bottom Layer w0.152: U3.12@201.93,109.308 cw(c201.93,107.682) 203.08,108.832 cw(c204.23,109.982) U3.12@202.604,109.982 ; U3.12@201.93,109.461 cw(c201.93,108.202) 202.82,109.092 cw(c203.71,109.982) U3.12@202.451,109.982 ; U3.12@201.93,109.613 cw(c201.93,108.722) 202.56,109.352 cw(c203.19,109.982) U3.12@202.299,109.982 ; U3.12@201.93,109.982 205.435,106.477 217.627,106.477 JDEBUG.2@219.964,104.14 ; JDEBUG.2@219.405,104.14 ccw(c218.056,104.14) 219.01,105.094 ccw(c219.964,106.048) JDEBUG.2@219.964,104.699 ; JDEBUG.2@219.558,104.14 ccw(c218.576,104.14) 219.27,104.834 ccw(c219.964,105.528) JDEBUG.2@219.964,104.546
NetJDEBUG_3: JDEBUG.3 U3.11 | length 26.4
  Bottom Layer w0.152: U3.11@201.93,111.848 cw(c201.93,110.222) 203.08,111.372 cw(c204.23,112.522) U3.11@202.604,112.522 ; U3.11@201.93,112.001 cw(c201.93,110.742) 202.82,111.632 cw(c203.71,112.522) U3.11@202.451,112.522 ; U3.11@201.93,112.153 cw(c201.93,111.262) 202.56,111.892 cw(c203.19,112.522) U3.11@202.299,112.522 ; U3.11@201.93,112.522 203.517,110.935 210.185,110.935 213.907,107.213 219.431,107.213 JDEBUG.3@219.964,106.68
NetJDEBUG_4: JDEBUG.4 U3.10 | length 30
  Bottom Layer w0.152: U3.10@201.93,114.388 cw(c201.93,112.762) 203.08,113.912 cw(c204.23,115.062) U3.10@202.604,115.062 ; U3.10@201.93,114.541 cw(c201.93,113.282) 202.82,114.172 cw(c203.71,115.062) U3.10@202.451,115.062 ; U3.10@201.93,114.693 cw(c201.93,113.802) 202.56,114.432 cw(c203.19,115.062) U3.10@202.299,115.062 ; U3.10@201.93,115.062 205.777,111.215 217.969,111.215 JDEBUG.4@219.964,109.22 ; JDEBUG.4@219.405,109.22 ccw(c218.056,109.22) 219.01,110.174 ccw(c219.964,111.128) JDEBUG.4@219.964,109.779 ; JDEBUG.4@219.558,109.22 ccw(c218.576,109.22) 219.27,109.914 ccw(c219.964,110.608) JDEBUG.4@219.964,109.626
NetJDEBUG_5: JDEBUG.5 U3.9 | length 30.2
  Bottom Layer w0.152: U3.9@201.93,116.928 cw(c201.93,115.302) 203.08,116.452 cw(c204.23,117.602) U3.9@202.604,117.602 ; U3.9@201.93,117.081 cw(c201.93,115.822) 202.82,116.712 cw(c203.71,117.602) U3.9@202.451,117.602 ; U3.9@201.93,117.233 cw(c201.93,116.342) 202.56,116.972 cw(c203.19,117.602) U3.9@202.299,117.602 ; U3.9@201.93,117.602 207.975,111.557 211.163,111.557 211.366,111.76 JDEBUG.5@219.964,111.76 ; JDEBUG.5@219.569,111.365 ccw(c218.615,110.411) 218.615,111.76 ccw(c218.615,113.109) JDEBUG.5@219.569,112.155 ; JDEBUG.5@219.677,111.473 ccw(c218.983,110.779) 218.983,111.76 ccw(c218.983,112.741) JDEBUG.5@219.677,112.047
NetJDEBUG_6: JDEBUG.6 U3.15 | length 47.8
  Bottom Layer w0.152: U3.15@201.256,102.362 cw(c199.63,102.362) 200.78,101.212 cw(c201.93,100.062) U3.15@201.93,101.688 ; U3.15@201.409,102.362 cw(c200.15,102.362) 201.04,101.472 cw(c201.93,100.582) U3.15@201.93,101.841 ; U3.15@201.561,102.362 cw(c200.67,102.362) 201.3,101.732 cw(c201.93,101.102) U3.15@201.93,101.993 ; U3.15@201.93,102.362 200.697,101.129 200.697,99.06 201.168,98.589 218.604,98.589 220.802,100.787 220.802,113.462 ; JDEBUG.6@219.964,114.3 220.802,113.462 ; JDEBUG.6@220.003,113.895 cw(c220.071,113.188) 220.574,113.69 cw(c221.076,114.193) JDEBUG.6@220.369,114.261 ; JDEBUG.6@220.017,113.744 cw(c220.111,112.77) 220.802,113.462 ; JDEBUG.6@220.52,114.247 ccw(c221.494,114.153) 220.802,113.462
NetJDEBUG_7: JDEBUG.7 U3.14 | length 43.5
  Top Layer w0.152: U3.14@201.93,104.902 202.895,103.937 ; U3.14@201.998,104.385 cw(c202.105,103.583) 202.677,104.155 cw(c203.249,104.727) U3.14@202.447,104.834 ; U3.14@202.018,104.234 cw(c202.156,103.197) 202.895,103.937 ; U3.14@202.598,104.814 ccw(c203.635,104.676) 202.895,103.937 ; JDEBUG.7@219.569,116.445 ccw(c218.615,115.491) 218.615,116.84 ccw(c218.615,118.189) JDEBUG.7@219.569,117.235 ; JDEBUG.7@219.677,116.553 ccw(c218.983,115.859) 218.983,116.84 ccw(c218.983,117.821) JDEBUG.7@219.677,117.127 ; JDEBUG.7@219.964,116.84 213.69,116.84 211.975,118.555 208.915,118.555 208.597,118.237 208.597,116.955 208.915,116.637 209.55,116.637 210.515,115.672 210.515,104.267 210.185,103.937 202.895,103.937
NetLED1_1: LED1.1 R1.2 | length 21.3
  Top Layer w0.152: R1.2@209.028,78.119 ccw(c208.074,79.073) 209.423,79.073 ccw(c210.772,79.073) R1.2@209.818,78.119 ; R1.2@209.136,78.011 ccw(c208.442,78.705) 209.423,78.705 ccw(c210.404,78.705) R1.2@209.71,78.011 ; R1.2@209.423,77.724 209.423,80.962 209.867,81.407 LED1.1@216.535,81.407 ; LED1.1@215.988,80.86 ccw(c214.667,79.539) 214.667,81.407 ccw(c214.667,83.275) LED1.1@215.988,81.954 ; LED1.1@216.096,80.968 ccw(c215.035,79.907) 215.035,81.407 ccw(c215.035,82.907) LED1.1@216.096,81.846 ; LED1.1@216.203,81.075 ccw(c215.403,80.275) 215.403,81.407 ccw(c215.403,82.539) LED1.1@216.203,81.739
NetLED2_1: LED2.1 R2.2 | length 15.5
  Top Layer w0.152: R2.2@209.272,74.452 ccw(c209.217,74.651) 209.423,74.651 ; R2.2@209.423,73.914 209.423,74.651 ; R2.2@209.574,74.452 cw(c209.629,74.651) 209.423,74.651 ; LED2.1@215.988,74.129 ccw(c214.667,72.808) 214.667,74.676 ccw(c214.667,76.544) LED2.1@215.988,75.223 ; LED2.1@216.096,74.237 ccw(c215.035,73.176) 215.035,74.676 ccw(c215.035,76.176) LED2.1@216.096,75.115 ; LED2.1@216.203,74.344 ccw(c215.403,73.544) 215.403,74.676 ccw(c215.403,75.808) LED2.1@216.203,75.008 ; LED2.1@216.535,74.676 209.448,74.676 209.423,74.651
NetLED3_1: LED3.1 R3.2 | length 18.8
  Top Layer w0.152: R3.2@209.423,69.596 214.249,69.596 LED3.1@216.535,67.31 ; R3.2@209.837,69.309 cw(c210.531,68.615) 210.531,69.596 cw(c210.531,70.577) R3.2@209.837,69.883 ; R3.2@209.945,69.201 cw(c210.899,68.247) 210.899,69.596 cw(c210.899,70.945) R3.2@209.945,69.991 ; LED3.1@215.761,67.31 ccw(c213.893,67.31) 215.214,68.631 ccw(c216.535,69.952) LED3.1@216.535,68.084 ; LED3.1@215.914,67.31 ccw(c214.413,67.31) 215.474,68.371 ccw(c216.535,69.432) LED3.1@216.535,67.931 ; LED3.1@216.066,67.31 ccw(c214.934,67.31) 215.734,68.111 ccw(c216.535,68.911) LED3.1@216.535,67.779
NetLED4_1: LED4.1 R4.2 | length 20.1
  Top Layer w0.152: R4.2@209.423,65.278 211.201,65.278 LED4.1@216.535,59.944 ; R4.2@209.837,64.991 cw(c210.531,64.297) 210.531,65.278 cw(c210.531,66.259) R4.2@209.837,65.565 ; R4.2@209.945,64.883 cw(c210.899,63.929) 210.899,65.278 cw(c210.899,66.627) R4.2@209.945,65.673 ; LED4.1@215.761,59.944 ccw(c213.893,59.944) 215.214,61.265 ccw(c216.535,62.586) LED4.1@216.535,60.718 ; LED4.1@215.914,59.944 ccw(c214.413,59.944) 215.474,61.005 ccw(c216.535,62.066) LED4.1@216.535,60.565 ; LED4.1@216.066,59.944 ccw(c214.934,59.944) 215.734,60.745 ccw(c216.535,61.545) LED4.1@216.535,60.413
NetOE_2: OE.2 R_OE.2 | length 18.3
  Top Layer w0.152: OE.2@190.08,239.561 ccw(c188.759,240.882) 190.627,240.882 ccw(c192.495,240.882) OE.2@191.174,239.561 ; OE.2@190.188,239.453 ccw(c189.127,240.514) 190.627,240.514 ccw(c192.127,240.514) OE.2@191.066,239.453 ; OE.2@190.295,239.346 ccw(c189.495,240.146) 190.627,240.146 ccw(c191.759,240.146) OE.2@190.959,239.346 ; R_OE.2@190.486,245.985 cw(c189.532,245.031) 190.881,245.031 cw(c192.23,245.031) R_OE.2@191.276,245.985 ; R_OE.2@190.594,246.093 cw(c189.9,245.399) 190.881,245.399 cw(c191.862,245.399) R_OE.2@191.168,246.093 ; OE.2@190.627,239.014 190.627,242.773 190.881,243.027 R_OE.2@190.881,246.507
NetR1_1: R1.1 U6.3 | length 36
  Top Layer w0.152: U6.3@191.008,86.868 192.786,86.868 v1(193.04,87.122) ; U6.3@191.766,86.868 ccw(c191.766,88.396) v1@192.846,87.316 ; U6.3@191.881,86.706 cw(c192.271,86.316) 192.271,86.868 cw(c192.271,87.42) U6.3@191.881,87.03 ; 192.134,86.868 ccw(c192.134,88.028) v1@192.954,87.208 ; 192.502,86.868 ccw(c192.502,87.66) v1@193.062,87.1 ; R1.1@206.742,78.119 ccw(c205.788,79.073) 207.137,79.073 ccw(c208.486,79.073) R1.1@207.532,78.119 ; R1.1@206.85,78.011 ccw(c206.156,78.705) 207.137,78.705 ccw(c208.118,78.705) R1.1@207.424,78.011 ; v1@206.943,86.928 cw(c206.476,86.461) 207.137,86.461 cw(c207.798,86.461) v1@207.331,86.928 ; R1.1@207.137,77.724 v1(207.137,87.122)
  Bottom Layer w0.152: v1(193.04,87.122) v1(207.137,87.122) ; v1@193.234,86.928 cw(c193.701,86.461) 193.701,87.122 cw(c193.701,87.783) v1@193.234,87.316 ; v1@206.943,86.928 ccw(c206.476,86.461) 206.476,87.122 ccw(c206.476,87.783) v1@206.943,87.316
NetR2_1: R2.1 U6.5 | length 32.3
  Top Layer w0.152: U6.5@191.008,84.328 193.18,84.328 193.624,84.772 193.624,87.058 193.992,87.427 199.39,87.427 206.172,80.645 206.172,76.886 207.137,75.921 R2.1@207.137,73.914 ; U6.5@191.881,84.166 cw(c192.271,83.776) 192.271,84.328 cw(c192.271,84.88) U6.5@191.881,84.49 ; R2.1@206.742,74.309 ccw(c205.788,75.263) 207.137,75.263 ccw(c208.486,75.263) R2.1@207.532,74.309 ; R2.1@206.85,74.201 ccw(c206.156,74.895) 207.137,74.895 ccw(c208.118,74.895) R2.1@207.424,74.201
NetR3_1: R3.1 U6.7 | length 36.7
  Top Layer w0.152: U6.7@191.008,81.788 194.627,81.788 194.945,82.105 194.945,85.814 195.262,86.131 199.568,86.131 199.974,85.725 199.974,78.969 207.137,71.806 R3.1@207.137,69.596 ; U6.7@191.881,81.626 cw(c192.271,81.236) 192.271,81.788 cw(c192.271,82.34) U6.7@191.881,81.95 ; R3.1@206.742,69.991 ccw(c205.788,70.945) 207.137,70.945 ccw(c208.486,70.945) R3.1@207.532,69.991 ; R3.1@206.85,69.883 ccw(c206.156,70.577) 207.137,70.577 ccw(c208.118,70.577) R3.1@207.424,69.883
NetR4_1: R4.1 U6.9 | length 36.1
  Top Layer w0.152: U6.9@191.008,79.248 191.999,79.248 192.507,78.74 192.507,77.216 191.719,76.429 v1(191.719,74.397) ; v1@191.526,74.59 ccw(c191.058,75.058) 191.719,75.058 ccw(c192.38,75.058) v1@191.913,74.59 ; U6.9@191.719,79.172 cw(c191.719,78.313) 192.326,78.92 ; U6.9@191.719,79.324 cw(c191.719,78.834) 192.066,79.181 ; R4.1@206.742,65.673 ccw(c205.788,66.627) 207.137,66.627 ccw(c208.486,66.627) R4.1@207.532,65.673 ; R4.1@206.85,65.565 ccw(c206.156,66.259) 207.137,66.259 ccw(c208.118,66.259) R4.1@207.424,65.565 ; v1@206.943,67.878 cw(c206.476,67.411) 207.137,67.411 cw(c207.798,67.411) v1@207.331,67.878 ; R4.1@207.137,65.278 v1(207.137,68.072)
  Bottom Layer w0.152: v1(191.719,74.397) 200.812,74.397 v1(207.137,68.072) ; v1@191.913,74.203 cw(c192.38,73.736) 192.38,74.397 cw(c192.38,75.058) v1@191.913,74.59 ; v1@206.863,68.072 ccw(c206.202,68.072) 206.67,68.539 ccw(c207.137,69.007) v1@207.137,68.346
NetR5_1: R5.1 U6.12 | length 66.9
  Top Layer w0.152: R5.1@192.036,19.935 ccw(c191.85,20.32) 192.278,20.32 ; R5.1@192.102,19.797 ccw(c191.967,20.078) 192.278,20.078 ccw(c192.589,20.078) R5.1@192.454,19.797 ; R5.1@192.278,19.431 192.278,20.32 ; R5.1@192.52,19.935 cw(c192.706,20.32) 192.278,20.32 ; U6.12@196.993,79.086 ccw(c196.603,78.696) 196.603,79.248 ccw(c196.603,79.8) U6.12@196.993,79.41 ; U6.12@197.866,79.248 196.532,79.248 196.088,78.803 196.088,21.59 195.669,21.171 193.129,21.171 192.278,20.32
NetR6_1: R6.1 U6.14 | length 67.8
  Top Layer w0.152: R6.1@191.9,23.907 ccw(c191.114,24.765) 192.278,24.765 ; R6.1@192.003,23.795 ccw(c191.432,24.419) 192.278,24.419 ccw(c193.124,24.419) R6.1@192.553,23.795 ; R6.1@192.278,23.495 192.278,24.765 ; R6.1@192.656,23.907 cw(c193.442,24.765) 192.278,24.765 ; U6.14@196.94,81.866 ccw(c196.706,81.951) 196.882,82.128 ccw(c197.15,82.396) U6.14@197.153,82.017 ; U6.14@196.947,81.884 ccw(c196.773,81.965) 196.909,82.101 ccw(c197.116,82.308) U6.14@197.138,82.016 ; U6.14@197.866,81.788 196.942,81.788 196.942,82.067 196.915,82.094 196.115,82.094 195.809,81.788 195.809,26.327 194.564,25.082 192.595,25.082 192.278,24.765
NetR7_1: R7.1 U6.16 | length 65.6
  Top Layer w0.152: R7.1@191.883,28.462 ccw(c190.929,29.416) 192.278,29.416 ccw(c193.627,29.416) R7.1@192.673,28.462 ; R7.1@191.991,28.354 ccw(c191.297,29.048) 192.278,29.048 ccw(c193.259,29.048) R7.1@192.565,28.354 ; R7.1@192.278,28.067 192.278,29.909 192.722,30.353 195.085,30.353 195.529,30.797 195.529,83.96 195.897,84.328 U6.16@197.866,84.328 ; U6.16@196.993,84.166 ccw(c196.603,83.776) 196.603,84.328 ccw(c196.603,84.88) U6.16@196.993,84.49
NetR8_1: R8.1 U6.18 | length 68.9
  Top Layer w0.152: R8.1@191.883,33.034 ccw(c190.929,33.988) 192.278,33.988 ccw(c193.627,33.988) R8.1@192.673,33.034 ; R8.1@191.991,32.926 ccw(c191.297,33.62) 192.278,33.62 ccw(c193.259,33.62) R8.1@192.565,32.926 ; R8.1@192.278,32.639 192.278,76.073 192.786,76.581 192.786,80.683 192.189,81.28 189.814,81.28 189.789,81.305 189.789,82.029 190.183,82.423 193.459,82.423 193.904,82.867 193.904,86.462 194.31,86.868 U6.18@197.866,86.868 ; U6.18@196.993,86.706 ccw(c196.603,86.316) 196.603,86.868 ccw(c196.603,87.42) U6.18@196.993,87.03
NetR_8sel_1: R_8sel.1 U2.5 | length 66.7
  Top Layer w0.152: R_8sel.1@117.461,223.506 cw(c116.507,222.552) 117.856,222.552 cw(c119.205,222.552) R_8sel.1@118.251,223.506 ; R_8sel.1@117.569,223.614 cw(c116.875,222.92) 117.856,222.92 cw(c118.837,222.92) R_8sel.1@118.143,223.614 ; R_8sel.1@117.856,224.028 117.856,220.028 118.199,219.685 v1(125.298,219.685) ; v1@125.105,219.491 ccw(c124.637,219.024) 124.637,219.685 ccw(c124.637,220.346) v1@125.105,219.878 ; v1@165.922,224.723 cw(c165.455,224.256) 166.116,224.256 cw(c166.777,224.256) v1@166.31,224.723 ; U2.5@165.954,222.361 ccw(c165.564,222.751) 166.116,222.751 ccw(c166.668,222.751) U2.5@166.278,222.361 ; U2.5@166.116,221.488 v1(166.116,224.917)
  Bottom Layer w0.152: v1(125.298,219.685) 130.531,224.917 v1(166.116,224.917) ; v1@125.298,219.958 ccw(c125.298,220.619) 125.766,220.152 ccw(c126.233,219.685) v1@125.572,219.685 ; v1@165.922,224.723 ccw(c165.455,224.256) 165.455,224.917 ccw(c165.455,225.578) v1@165.922,225.111
NetR_16sel_1: R_16sel.1 U2.7 | length 52.8
  Top Layer w0.152: R_16sel.1@126.619,223.901 v1(135.611,223.901) ; R_16sel.1@126.906,223.614 cw(c127.6,222.92) 127.6,223.901 cw(c127.6,224.882) R_16sel.1@126.906,224.188 ; R_16sel.1@127.014,223.506 cw(c127.968,222.552) 127.968,223.901 cw(c127.968,225.25) R_16sel.1@127.014,224.296 ; v1@135.417,223.707 ccw(c134.95,223.24) 134.95,223.901 ccw(c134.95,224.562) v1@135.417,224.095 ; v1@168.462,223.276 cw(c167.995,222.808) 168.656,222.808 cw(c169.317,222.808) v1@168.85,223.276 ; U2.7@168.494,222.361 ccw(c168.104,222.751) 168.656,222.751 ccw(c169.208,222.751) U2.7@168.818,222.361 ; U2.7@168.656,221.488 v1(168.656,223.469)
  Bottom Layer w0.152: v1(135.611,223.901) 136.042,223.469 ; v1@135.626,223.628 cw(c135.658,223.085) 136.042,223.469 ; v1@135.884,223.885 ccw(c136.427,223.854) 136.042,223.469 ; v1@168.462,223.276 ccw(c167.995,222.808) 167.995,223.469 ccw(c167.995,224.13) v1@168.462,223.663 ; v1(168.656,223.469) 136.042,223.469
NetR_24sel_1: R_24sel.1 U2.9 | length 45.8
  Top Layer w0.152: R_24sel.1@138.303,223.901 142.469,223.901 v1(142.697,224.13) ; R_24sel.1@138.59,223.614 cw(c139.284,222.92) 139.284,223.901 cw(c139.284,224.882) R_24sel.1@138.59,224.188 ; R_24sel.1@138.698,223.506 cw(c139.652,222.552) 139.652,223.901 cw(c139.652,225.25) R_24sel.1@138.698,224.296 ; 141.484,223.901 ccw(c141.484,225.342) v1@142.504,224.323 ; 141.852,223.901 ccw(c141.852,224.975) v1@142.611,224.215 ; 142.22,223.901 ccw(c142.22,224.607) v1@142.719,224.108 ; v1@171.002,223.936 cw(c170.535,223.469) 171.196,223.469 cw(c171.857,223.469) v1@171.39,223.936 ; U2.9@171.034,222.361 ccw(c170.644,222.751) 171.196,222.751 ccw(c171.748,222.751) U2.9@171.358,222.361 ; U2.9@171.196,221.488 v1(171.196,224.13)
  Bottom Layer w0.152: v1(142.697,224.13) v1(171.196,224.13) ; v1@142.891,223.936 cw(c143.358,223.469) 143.358,224.13 cw(c143.358,224.791) v1@142.891,224.323 ; v1@171.002,223.936 ccw(c170.535,223.469) 170.535,224.13 ccw(c170.535,224.791) v1@171.002,224.323
NetR_32sel_1: R_32sel.1 U2.12 | length 34.7
  Top Layer w0.152: R_32sel.1@147.955,224.409 155.626,224.409 v1(157.531,226.314) ; R_32sel.1@148.242,224.122 cw(c148.936,223.428) 148.936,224.409 cw(c148.936,225.39) R_32sel.1@148.242,224.696 ; R_32sel.1@148.35,224.014 cw(c149.304,223.06) 149.304,224.409 cw(c149.304,225.758) R_32sel.1@148.35,224.804 ; v1@157.257,226.314 cw(c156.596,226.314) 157.063,225.847 cw(c157.531,225.379) v1@157.531,226.04 ; v1@171.002,226.508 ccw(c170.535,226.975) 171.196,226.975 ccw(c171.857,226.975) v1@171.39,226.508 ; U2.12@171.034,227.473 cw(c170.644,227.083) 171.196,227.083 cw(c171.748,227.083) U2.12@171.358,227.473 ; v1(171.196,226.314) U2.12@171.196,228.346
  Bottom Layer w0.152: v1(157.531,226.314) v1(171.196,226.314) ; v1@157.724,226.12 cw(c158.192,225.653) 158.192,226.314 cw(c158.192,226.975) v1@157.724,226.508 ; v1@171.002,226.12 ccw(c170.535,225.653) 170.535,226.314 ccw(c170.535,226.975) v1@171.002,226.508
NetR_CS_1: R_CS.1 U2.18 | length 31.9
  Top Layer w0.152: U2.18@163.414,229.219 ccw(c163.024,229.609) 163.576,229.609 ccw(c164.128,229.609) U2.18@163.738,229.219 ; U2.18@163.576,228.346 163.576,234.975 167.767,239.166 167.767,248.602 168.084,248.92 R_CS.1@173.006,248.92 ; R_CS.1@172.611,248.525 ccw(c171.657,247.571) 171.657,248.92 ccw(c171.657,250.269) R_CS.1@172.611,249.315 ; R_CS.1@172.718,248.633 ccw(c172.025,247.939) 172.025,248.92 ccw(c172.025,249.901) R_CS.1@172.718,249.207
NetR_OE_1: R_OE.1 U2.14 | length 46.4
  Top Layer w0.152: U2.14@168.494,229.219 ccw(c168.104,229.609) 168.656,229.609 ccw(c169.208,229.609) U2.14@168.818,229.219 ; U2.14@168.656,228.346 168.656,233.362 169.024,233.731 186.055,233.731 186.614,234.29 186.614,248.399 187.007,248.793 R_OE.1@190.881,248.793 ; R_OE.1@190.486,248.398 ccw(c189.532,247.444) 189.532,248.793 ccw(c189.532,250.142) R_OE.1@190.486,249.188 ; R_OE.1@190.594,248.506 ccw(c189.9,247.812) 189.9,248.793 ccw(c189.9,249.774) R_OE.1@190.594,249.08
NetR_RDY_1: R_RDY.1 U2.3 | length 34.5
  Top Layer w0.152: U2.3@163.414,222.361 ccw(c163.024,222.751) 163.576,222.751 ccw(c164.128,222.751) U2.3@163.738,222.361 ; U2.3@163.576,221.488 163.576,224.917 163.068,225.425 163.068,248.602 163.386,248.92 R_RDY.1@165.608,248.92 ; R_RDY.1@165.213,248.525 ccw(c164.259,247.571) 164.259,248.92 ccw(c164.259,250.269) R_RDY.1@165.213,249.315 ; R_RDY.1@165.321,248.633 ccw(c164.627,247.939) 164.627,248.92 ccw(c164.627,249.901) R_RDY.1@165.321,249.207
NetR_RDY_2: R_RDY.2 RDY.1 | length 18.3
  Top Layer w0.152: RDY.1@164.338,239.141 165.608,240.411 ; RDY.1@164.351,239.61 ccw(c164.38,240.638) 165.108,239.911 ccw(c165.835,239.183) RDY.1@164.807,239.154 ; RDY.1@164.356,239.762 ccw(c164.394,241.125) 165.358,240.161 ccw(c166.322,239.197) RDY.1@164.959,239.159 ; RDY.1@164.36,239.914 ccw(c164.408,241.611) 165.608,240.411 ; RDY.1@165.111,239.163 cw(c166.808,239.211) 165.608,240.411 ; R_RDY.2@165.213,246.112 cw(c164.259,245.158) 165.608,245.158 cw(c166.957,245.158) R_RDY.2@166.003,246.112 ; R_RDY.2@165.321,246.22 cw(c164.627,245.526) 165.608,245.526 cw(c166.589,245.526) R_RDY.2@165.895,246.22 ; R_RDY.2@165.608,246.634 165.608,240.411
NetR_WE_1: R_WE.1 U2.16 | length 48.8
  Top Layer w0.152: U2.16@165.954,227.473 cw(c165.564,227.083) 166.116,227.083 cw(c166.668,227.083) U2.16@166.278,227.473 ; U2.16@166.116,228.346 166.116,227.076 166.091,227.051 164.617,227.051 164.338,227.33 164.338,233.68 164.681,234.023 179.362,234.023 182.753,237.414 182.753,246.38 182.324,246.38 R_WE.1@182.324,246.507 ; R_WE.1@181.929,245.985 cw(c179.941,243.996) 182.753,243.996 ; R_WE.1@182.037,246.093 cw(c180.309,244.364) 182.753,244.364 ; R_WE.1@182.145,246.2 cw(c180.676,244.732) 182.753,244.732 ; R_WE.1@182.253,246.308 cw(c181.044,245.1) 182.753,245.1 ; R_WE.1@182.36,246.416 cw(c181.412,245.468) 182.753,245.468 ; R_WE.1@182.468,246.524 cw(c181.78,245.836) R_WE.1@182.753,245.836
NetR_WE_2: R_WE.2 WE.2 | length 18
  Top Layer w0.152: WE.2@181.13,239.561 ccw(c179.809,240.882) 181.677,240.882 ccw(c183.545,240.882) WE.2@182.224,239.561 ; WE.2@181.238,239.453 ccw(c180.177,240.514) 181.677,240.514 ccw(c183.177,240.514) WE.2@182.117,239.453 ; WE.2@181.346,239.346 ccw(c180.545,240.146) 181.677,240.146 ccw(c182.809,240.146) WE.2@182.009,239.346 ; WE.2@181.677,239.014 181.677,245.348 181.483,245.542 181.483,247.447 181.934,247.898 182.296,247.898 182.324,247.926 ; R_WE.2@182.172,248.128 cw(c182.114,247.926) 182.324,247.926 ; R_WE.2@182.324,248.793 182.324,247.926 ; R_WE.2@182.477,248.128 ccw(c182.535,247.926) 182.324,247.926
NetU9_1: U9.1 U10.3 | length 31.7
  Top Layer w0.152: U9.1@177.638,185.563 cw(c177.248,185.173) 177.8,185.173 cw(c178.352,185.173) U9.1@177.962,185.563 ; U9.1@177.8,186.436 177.8,183.947 177.825,183.921 182.982,183.921 183.388,183.515 183.388,170.586 183.794,170.18 U10.3@192.024,170.18 ; U10.3@191.151,170.018 ccw(c190.761,169.628) 190.761,170.18 ccw(c190.761,170.732) U10.3@191.151,170.342
NetU9_5: U9.5 U11.3 | length 21.5
  Top Layer w0.152: U9.5@173.828,178.705 cw(c173.438,178.315) 173.99,178.315 cw(c174.542,178.315) U9.5@174.152,178.705 ; U9.5@173.99,179.578 173.99,174.625 172.466,173.101 172.466,168.478 172.491,168.453 174.854,168.453 174.879,168.478 174.879,170.637 175.26,171.018 176.759,171.018 176.784,170.993 U11.3@176.784,169.672 ; U11.3@176.622,170.545 ccw(c176.232,170.935) 176.784,170.935 ccw(c177.336,170.935) U11.3@176.946,170.545
NetU9_6: U9.6 U11.6 | length 12.6
  Top Layer w0.152: U11.6@172.812,170.545 ccw(c172.422,170.935) 172.974,170.935 ccw(c173.526,170.935) U11.6@173.136,170.545 ; U11.6@172.974,169.672 172.974,172.339 175.26,174.625 U9.6@175.26,179.578 ; U9.6@175.098,178.705 cw(c174.708,178.315) 175.26,178.315 cw(c175.812,178.315) U9.6@175.422,178.705
NetU10_6: U10.6 U11.1 | length 20.9
  Top Layer w0.152: v1@179.13,168.316 ccw(c178.663,168.784) 179.324,168.784 ccw(c179.985,168.784) v1@179.518,168.316 ; U11.1@179.162,168.799 cw(c178.772,168.409) 179.324,168.409 cw(c179.876,168.409) U11.1@179.486,168.799 ; v1(179.324,168.123) U11.1@179.324,169.672 ; v1(190.17,166.37) U10.6@192.024,166.37 ; v1@190.363,166.176 cw(c190.831,165.709) 190.831,166.37 cw(c190.831,167.031) v1@190.363,166.564 ; U10.6@191.151,166.208 ccw(c190.761,165.818) 190.761,166.37 ccw(c190.761,166.922) U10.6@191.151,166.532
  Bottom Layer w0.152: v1@179.324,167.849 cw(c179.324,167.188) 179.791,167.655 cw(c180.259,168.123) v1@179.598,168.123 ; v1(179.324,168.123) 180.111,167.335 189.205,167.335 v1(190.17,166.37) ; v1@189.896,166.37 ccw(c189.235,166.37) 189.702,166.837 ccw(c190.17,167.305) v1@190.17,166.644
NetU10_8: U10.8 U11.4 | length 35.5
  Top Layer w0.152: v1@175.32,166.945 ccw(c174.853,167.412) 175.514,167.412 ccw(c176.175,167.412) v1@175.708,166.945 ; U11.4@175.352,168.799 cw(c174.962,168.409) 175.514,168.409 cw(c176.066,168.409) U11.4@175.676,168.799 ; v1(175.514,166.751) U11.4@175.514,169.672 ; v1@186.319,168.767 cw(c185.851,168.3) 186.512,168.3 cw(c187.173,168.3) v1@186.706,168.767 ; v1(186.512,168.961) 186.512,166.052 187.319,165.245 188.435,165.245 188.849,165.659 194.259,165.659 194.818,165.1 U10.8@197.612,165.1 ; U10.8@196.739,164.938 ccw(c196.349,164.548) 196.349,165.1 ccw(c196.349,165.652) U10.8@196.739,165.262
  Bottom Layer w0.152: v1(175.514,166.751) 177.724,168.961 v1(186.512,168.961) ; v1@175.514,167.025 ccw(c175.514,167.686) 175.981,167.218 ccw(c176.449,166.751) v1@175.788,166.751 ; v1@186.319,168.767 ccw(c185.851,168.3) 185.851,168.961 ccw(c185.851,169.622) v1@186.319,169.154
RDY: U1.79 U2.17 U5.5 | length 291.5
  Top Layer w0.152: v1@73.974,43.52 cw(c73.507,43.052) 74.168,43.052 cw(c74.829,43.052) v1@74.362,43.52 ; v1(74.168,43.713) 74.168,39.776 74.676,39.268 U5.5@74.676,36.068 ; U5.5@74.514,36.941 ccw(c74.124,37.331) 74.676,37.331 ccw(c75.228,37.331) U5.5@74.838,36.941 ; v1@81.975,43.907 ccw(c81.508,44.374) 82.169,44.374 ccw(c82.83,44.374) v1@82.363,43.907 ; v1(82.169,43.713) 82.169,65.735 93.32,76.886 93.32,172.403 93.637,172.72 U1.79@101.092,172.72 v1(102.413,174.041) ; U1.79@99.572,172.35 ccw(c98.677,171.455) 98.677,172.72 ccw(c98.677,173.985) U1.79@99.572,173.09 ; U1.79@99.679,172.457 ccw(c99.045,171.823) 99.045,172.72 ccw(c99.045,173.617) U1.79@99.679,172.983 ; v1@102.139,174.041 cw(c101.478,174.041) 101.945,173.573 cw(c102.413,173.106) v1@102.413,173.767 ; v1(158.953,194.31) 163.5,194.31 165.938,196.748 165.938,219.634 166.878,220.574 166.878,225.654 167.894,226.67 167.894,229.552 167.5,229.946 165.24,229.946 164.846,229.552 ; v1@159.147,194.116 cw(c159.614,193.649) 159.614,194.31 cw(c159.614,194.971) v1@159.147,194.504 ; U2.17@164.698,229.231 ccw(c164.424,229.552) 164.846,229.552 ; U2.17@164.846,228.346 164.846,229.552 ; U2.17@164.994,229.231 cw(c165.268,229.552) 164.846,229.552
  Bottom Layer w0.152: v1(74.168,43.713) v1(82.169,43.713) ; v1@74.362,43.52 cw(c74.829,43.052) 74.829,43.713 cw(c74.829,44.374) v1@74.362,43.907 ; v1@81.975,43.52 ccw(c81.508,43.052) 81.508,43.713 ccw(c81.508,44.374) v1@81.975,43.907 ; v1(102.413,174.041) 106.121,177.749 106.121,193.421 106.68,193.98 158.623,193.98 v1(158.953,194.31) ; v1@102.413,174.315 ccw(c102.413,174.976) 102.88,174.508 ccw(c103.348,174.041) v1@102.687,174.041